# Altium PCB oled_control.PcbDoc
Units mil, origin at the board's own origin, x right, y up, seen from the top; angles counter-clockwise.
Board outline 6000 x 4000 mil, 2 copper layers (Top Layer, Bottom Layer); 53 components, 39 nets, 197 pads, 68 vias.
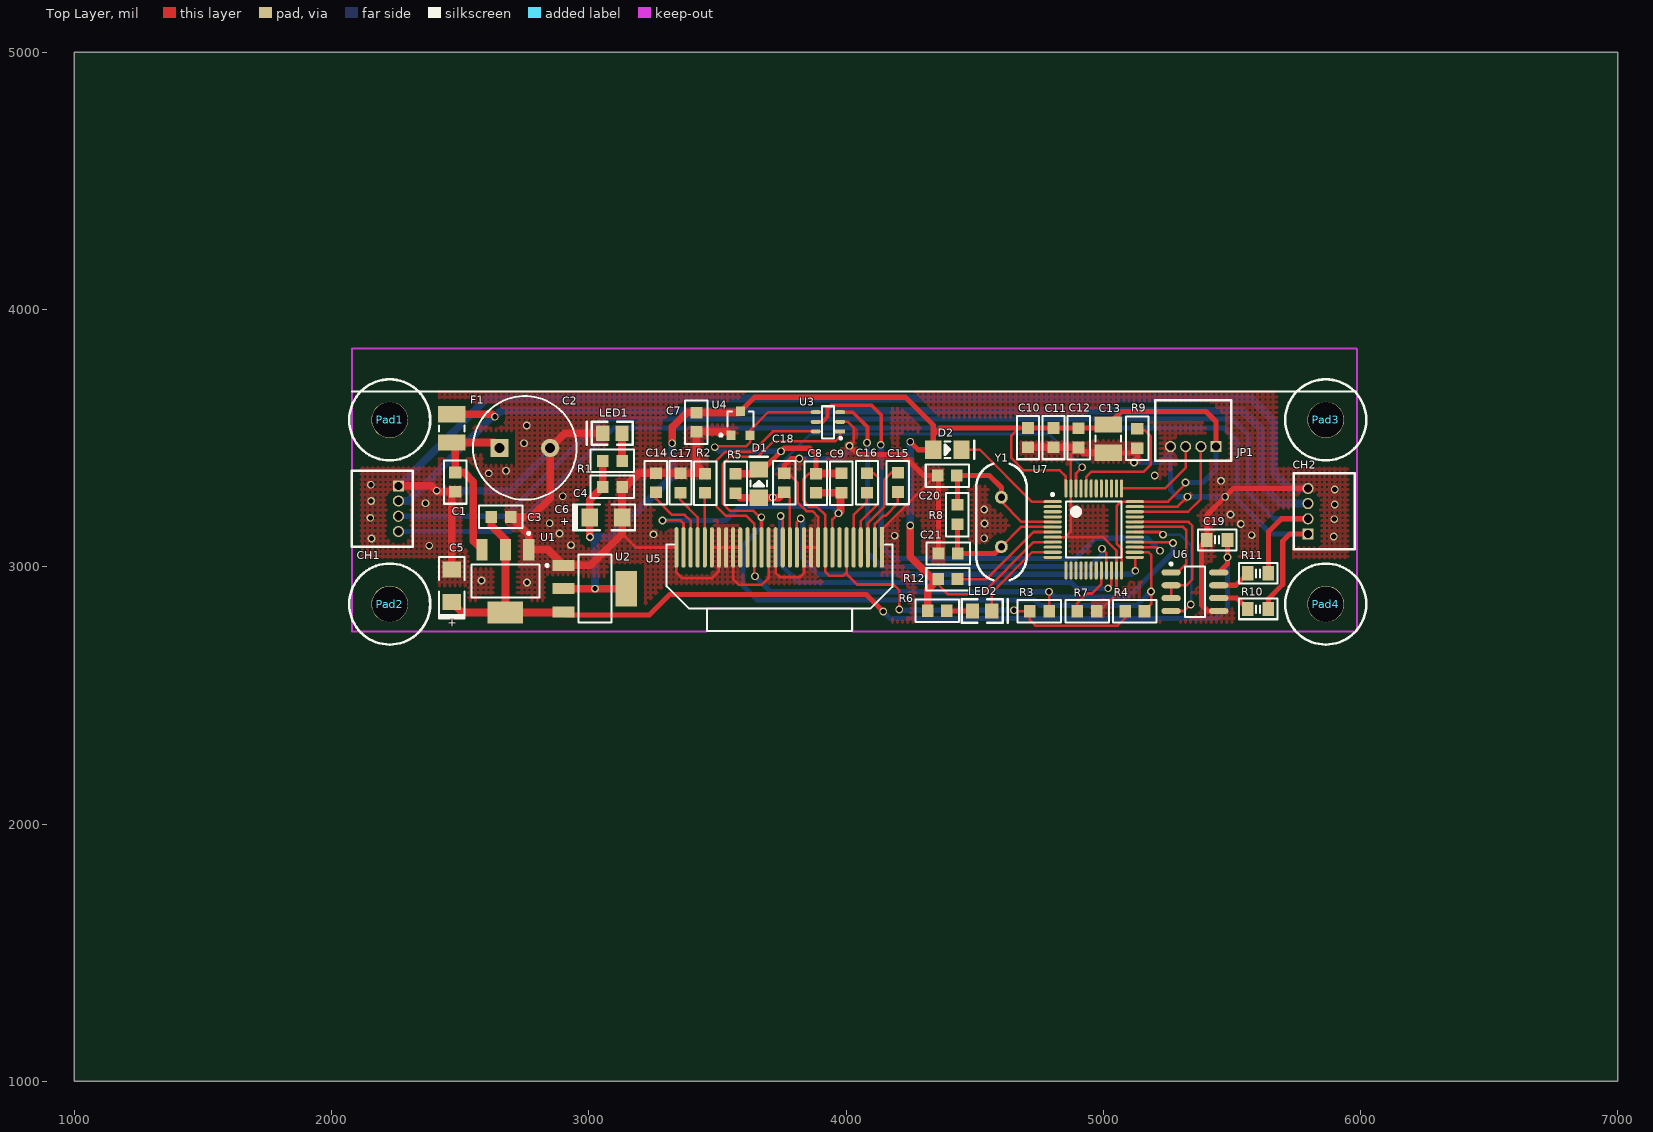
[diagram p0: Top Layer view]
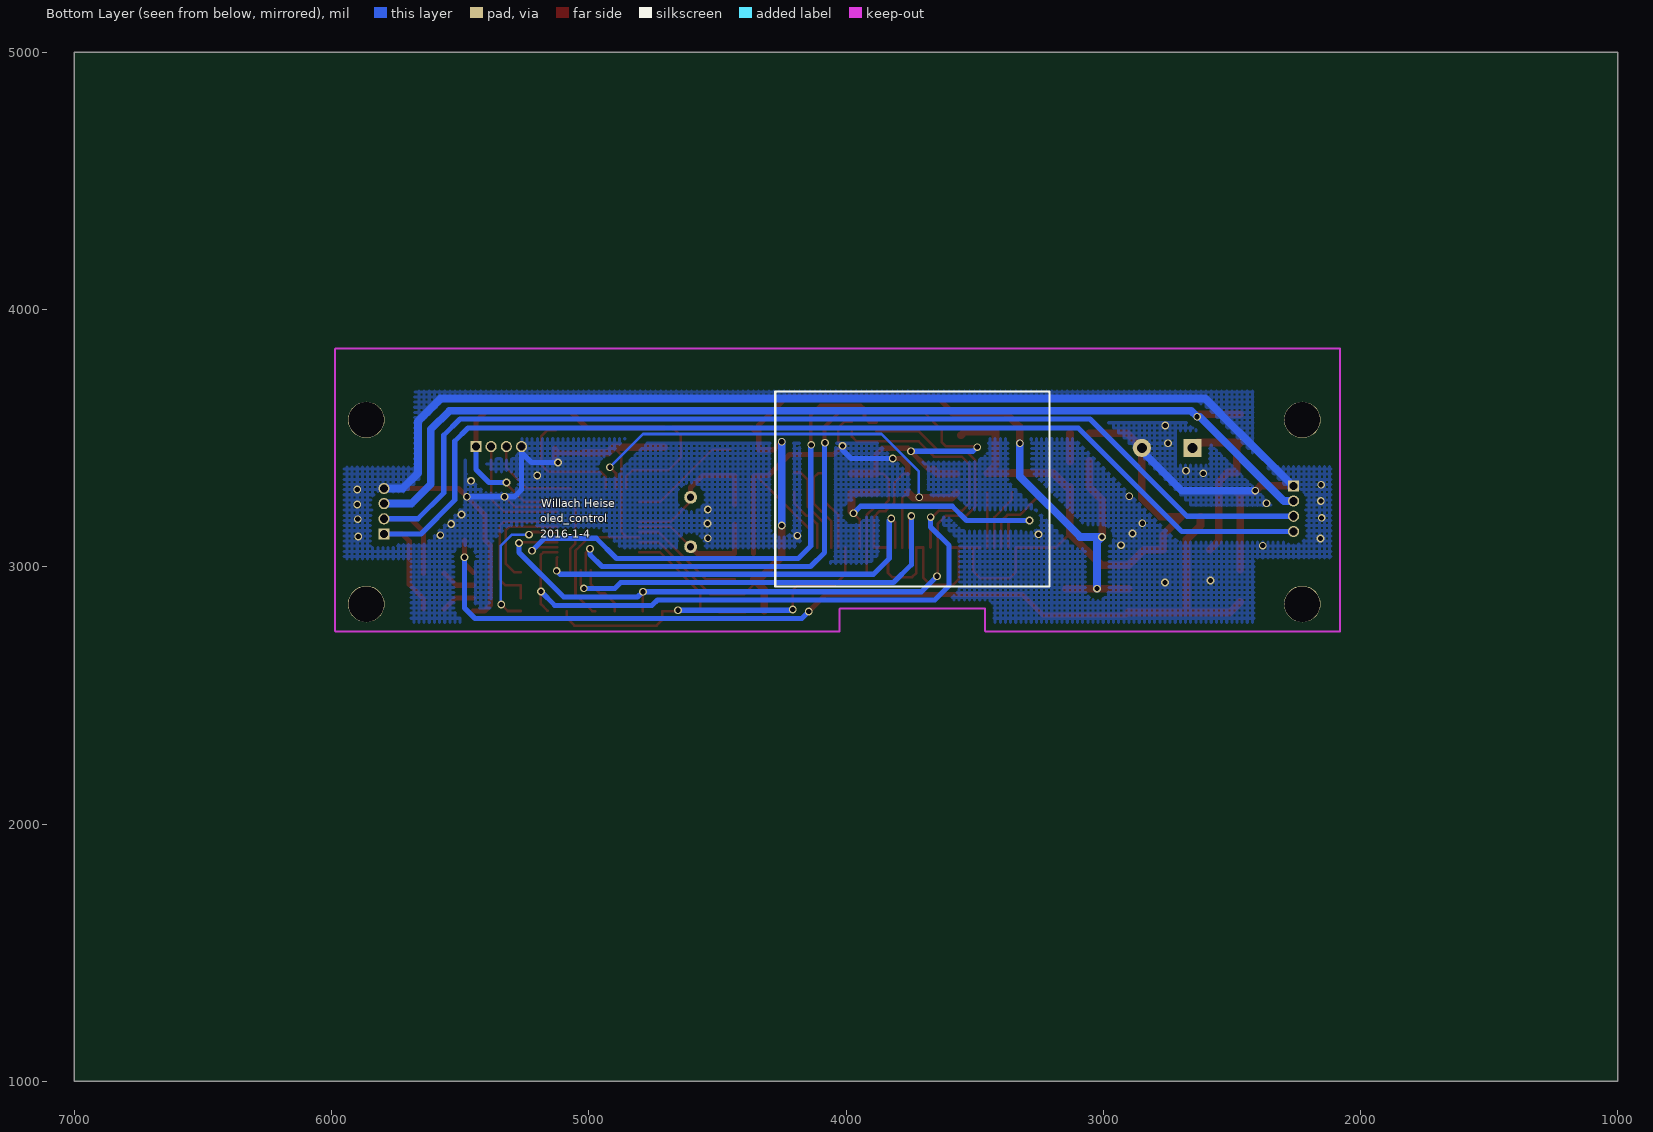
[diagram p1: Bottom Layer view, seen from below]

## Layer stack, top to bottom
Top Solder: solder mask 0.4, Solder Resist, Dk 3.5
Top Layer: signal copper 1.4
Dielectric 1: dielectric 12.6, FR-4, Dk 4.8
Bottom Layer: signal copper 1.4
Bottom Solder: solder mask 0.4, Solder Resist, Dk 3.5

## Board outline
1000,1000 7000,1000 7000,5000 1000,5000

## Design rules (kind name [scope] priority, off if disabled: settings)
Clearance Clearance_1 [InPolygon] p1: gap=25
Clearance [All] p2: gap=7
ComponentClearance [All] p1: gap=0 collisioncheckmode=3 verticalgap=0 showdistances=FALSE
PolygonConnect [All] p1: connectstyle=Direct reliefconductorwidth=10 reliefentries=4 polygonreliefangle="90 Angle" airgapwidth=10
RoutingVias [All] p1: holewidth=28 width=50 viastyle="Through Hole" minholewidth=28 minwidth=50 maxholewidth=28 maxwidth=50
SolderMaskExpansion [All] p1: expansion=4
Width [All] p1: maxlimit=100 minlimit=10 preferedwidth=100
28 further rules are at their usual default settings.

## Components (designator, comment, footprint, x,y, rotation, side; value= is the part's Value field where it differs from the comment)
C1 "Cap" 0805 2481,3329 r90 top
C2 "C_2200uF" C5*10 2653,3462 r0 top
C3 "Cap" 0805 2659,3194 r180 top
C4 "Cap" 0805 3092,3310 r180 top
C5 "Cap Pol3" "CAP A-3216" 2467,2926 r90 top
C6 "Cap Pol3" "CAP A-3216" 3067,3192 r0 top
C7 "Cap" 0805 3419,3562 r270 top
C8 "Cap" 0805 3883,3325 r270 top
C9 "Cap" 0805 3982,3326 r270 top
C10 "Cap" 0805 4707,3502 r90 top
C11 "Cap" 0805 4806,3502 r90 top
C12 "Cap" 0805 4904,3501 r90 top
C13 "Cap Pol1" 3225[1210]#1 5020,3498 r270 top
C14 "Cap" 0805 3261,3327 r270 top
C15 "Cap" 0805 4202,3328 r270 top
C16 "Cap" 0805 4081,3326 r90 top
C17 "Cap" 0805 3356,3326 r90 top
C18 "Cap" 0805 3760,3327 r270 top
C19 "Cap" C0805tan 5443,3104 r180 top
C20 "Cap" 0805 4394,3355 r0 top
C21 "Cap" 0805 4397,3052 r0 top
CH1 "HEADER1X4" CON4_1.5 2260,3226 r270 top
CH2 "HEADER1X4" CON4_1.5 5796,3216 r90 top
D1 "Diode 1N4148" LL34 3661,3268 r90 top
D2 "Diode 1N4148" LL34 4339,3455 r0 top
F1 "FUSE" 3225[1210]#2 2467,3593 r270 top
JP1 "4 HEADER" CON4_1.5 5350,3467 r180 top
LED1 "" LED-0805 3129,3519 r180 top
LED2 "" LED-0805 4492,2828 r0 top
Pad1 "Pad" pad35 2225,3571 r0 top
Pad2 "Pad" pad35 2225,2855 r0 top
Pad3 "Pad" pad35 5864,3571 r0 top
Pad4 "Pad" pad35 5864,2855 r0 top
R1 "Res2" 0805 3092,3411 r180 top
R2 "Res2" 0805 3452,3325 r90 top
R3 "Res2" 0805 4752,2827 r180 top
R4 "Res2" 0805 5123,2827 r180 top
R5 "Res2" 0805 3571,3324 r90 top
R6 "Res2" 0805 4355,2829 r180 top
R7 "Res2" 0805 4937,2827 r0 top
R8 "Res2" 0805 4433,3203 r270 top
R9 "Res2" 0805 5132,3499 r90 top
R10 "Res2" C0805tan 5602,2836 r0 top
R11 "Res2" C0805tan 5602,2975 r0 top
R12 "Res2" 0805 4396,2952 r0 top
U1 "AMS1117-5.0" SOT223 2676,2944 r180 top
U2 "AMS1117-3.3" SOT223 3024,2915 r270 top
U3 "GT20L16S1Y" SOT23-6 3977,3526 r180 top
U4 "662K" SOT-23 3590,3558 r0 top
U5 "OLED_0.96_12864" OLED_0.96_12864 4140,3075 r180 top
U6 "MAX485CSA" NS08-L 5264,2978 r0 top
U7 "STM32F103C8T6" LQFP48 4963,3145 r0 top
Y1 "8MHz" XTAL_US 4604,3270 r270 top

## Footprints (in the part's own frame and the unit in brackets; to place one, negate y for a bottom-side part, rotate by r counter-clockwise, add the part's x,y. Pads: shape width x height; smd on the part's side, far side on the other; paste and mask are expansions set on the pad)
0805 [mm] "1.14mm,1.2mm,3.05mm"
  rect 1.14x1.2 smd: 1(-0.95,0) 2(0.95,0)
  silkscreen extent -2.13,-1.12 2.16,1.09
3225[1210]#1 [mm] "Chip Resistor; Body 3.2 x 2.5 mm (LxW typ)"
  rect 1.6x2.7 smd: 1(-1.4,0) 2(1.4,0)
  silkscreen extent -0.3,-1.25 0.3,1.25
3225[1210]#2 [mm] "Chip Resistor; Body 3.2 x 2.5 mm (LxW typ)"
  rect 1.6x2.7 smd: 1(0,0) 2(2.8,0)
  silkscreen extent 1.1,-1.25 1.7,1.25
C5*10 [mm]
  rect 1.8x1.8 hole 1: 1(0,0)
  round 1.8 hole 1: 2(5,0)
  silkscreen extent -2.62,-5.11 7.62,5.11
C0805tan [mil]
  rect 45x55 smd: 1(-40,0) 2(40,0)
  silkscreen extent -75,-40 75,40
"CAP A-3216" [mm]
  rect 1.6x1.8 smd: 1(-1.6,0) 2(1.6,0)
  silkscreen extent -3.25,-1.27 2.85,1.27
CON4_1.5 [mm]
  rect 1.1x1.1 hole 0.8: 1(-2.25,0)
  round 1.1 hole 0.8: 2(-0.75,0) 3(0.75,0) 4(2.25,0)
  silkscreen extent -3.75,-4.6 3.75,1.4
LED-0805 [mm]
  rect 1.3x1.5 smd: 1(0,0) 2(1.9,0)
  silkscreen extent -1.08,-1.14 3.49,1.14
LL34 [mm]
  rect 1.6x1.8 smd: 1(0,0) 2(2.8,0)
  silkscreen extent 1.1,-0.89 4.07,0.89
LQFP48 [mm]
  oval 1.8x0.3 smd: 1(-4.05,2.75) 2(-4.05,2.25) 3(-4.05,1.75) 4(-4.05,1.25) 5(-4.05,0.75) 6(-4.05,0.25) 7(-4.05,-0.25) 8(-4.05,-0.75) 9(-4.05,-1.25) 10(-4.05,-1.75) 11(-4.05,-2.25) 12(-4.05,-2.75) 25(4.05,-2.75) 26(4.05,-2.25) 27(4.05,-1.75) 28(4.05,-1.25) 29(4.05,-0.75) 30(4.05,-0.25) 31(4.05,0.25) 32(4.05,0.75) 33(4.05,1.25) 34(4.05,1.75) 35(4.05,2.25) 36(4.05,2.75)
  oval 0.3x1.8 smd: 13(-2.75,-4.05) 14(-2.25,-4.05) 15(-1.75,-4.05) 16(-1.25,-4.05) 17(-0.75,-4.05) 18(-0.25,-4.05) 19(0.25,-4.05) 20(0.75,-4.05) 21(1.25,-4.05) 22(1.75,-4.05) 23(2.25,-4.05) 24(2.75,-4.05) 37(2.75,4.05) 38(2.25,4.05) 39(1.75,4.05) 40(1.25,4.05) 41(0.75,4.05) 42(0.25,4.05) 43(-0.25,4.05) 44(-0.75,4.05) 45(-1.25,4.05) 46(-1.75,4.05) 47(-2.25,4.05) 48(-2.75,4.05)
  silkscreen extent -4.17,-2.75 2.75,3.57, body extent -3.5,-3.5 3.5,3.5, height 1.6
NS08-L [mm] "SOIC, 8-Leads, Body 4.9x3.9mm, Pitch 1.27mm, IPC High Density"
  oval 1.9x0.6 smd: 1(0,0) 2(0,-1.27) 3(0,-2.54) 4(0,-3.81) 5(4.7,-3.81) 6(4.7,-2.54) 7(4.7,-1.27) 8(4.7,0)
  silkscreen extent -0.12,-4.41 3.35,0.97, body extent 0.4,-4.36 4.3,0.55, height 1.75
OLED_0.96_12864 [mm]
  rect 0.4x4 smd: 1(0,0)
  oval 0.4x4 smd: 2(0.7,0) 3(1.4,0) 4(2.1,0) 5(2.8,0) 6(3.5,0) 7(4.2,0) 8(4.9,0) 9(5.6,0) 10(6.3,0) 11(7,0) 12(7.7,0) 13(8.4,0) 14(9.1,0) 15(9.8,0) 16(10.5,0) 17(11.2,0) 18(11.9,0) 19(12.6,0) 20(13.3,0) 21(14,0) 22(14.7,0) 23(15.4,0) 24(16.1,0) 25(16.8,0) 26(17.5,0) 27(18.2,0) 28(18.9,0) 29(19.6,0) 30(20.3,0)
  silkscreen extent -1.02,-0.3 21.26,8.26
pad35 [mm]
  round 3.6 hole 3.5: 1(0.025,0)
  silkscreen extent -3.97,-4 4.03,4
SOT23-6 [mm]
  rect 1x0.4 smd: 1(0,0)
  oval 1x0.4 smd: 2(0,-0.95) 3(0,-1.9) 4(2.4,-1.9) 5(2.4,-0.95) 6(2.4,0)
  silkscreen extent -0.15,-2.49 1.8,0.76
SOT223 [mm] "SOT-223/SC-73; 4 Leads; Body 6.7 x 7.3 mm, inc. leads (LxW max)"
  rect 1.1x2.15 smd: 1(-2.3,-3.1) 2(0,-3.1) 3(2.3,-3.1)
  rect 3.5x2.15 smd: 4(0,3.1)
  silkscreen extent -3.35,-4.85 3.35,1.63
SOT-23 [mm]
  rect 0.9x0.95 smd: 1(-0.95,-1.175) 2(0.95,-1.175) 3(0,1.175)
  silkscreen extent -2.07,-1.3 1.3,1.18
XTAL_US [mil]
  round 50 hole 28: 1(0,0) 2(192.13,0)
  silkscreen extent -131,-98 323,98

## Part data
C1 C3 C4 C7 C8 C9 C10 C11 C12 C14 C15 C16 C17 C18 C19 C20 C21: "Capacitor"
C5 C6: "Polarized Capacitor (Surface Mount)"
C13: "Polarized Capacitor (Radial)"
D1 D2: "High Conductance Fast Diode"
JP1: "4 Pin Header"
LED1 LED2: library part LED2, "Typical RED, GREEN, YELLOW, AMBER GaAs LED"
R1 R2 R3 R4 R5 R6 R7 R8 R9 R10 R11 R12: "Resistor"
U1 U2: library part AMS1117-5
Y1: library part XTAL, "Crystal Oscillator"

## Via types
v1: diameter 30, hole 20, Top Layer to Bottom Layer, 68 vias

## Nets (pads, with @x,y where several pads share a name; then routed paths per layer and width w, separated by ;. In a path a pad name is that pad's centre, name@x,y a point inside that pad or via, vN(x,y) a via of type N, cw(c..) or ccw(c..) an arc to the next point about the centre after c; other vN are vias at no path point)
485_A: CH1.4 CH2.1 R10.2 | length 4404.4
  Top Layer w20: R10.2 5642,2876 5698,2932 5698,3100 5725.42,3127.42 CH2.1
  Bottom Layer w20: CH1.4 2694.42,3137.42 3097,3540 5469,3540 5521,3488 5521,3259 5652.58,3127.42 CH2.1
485_B: CH1.3 CH2.2 R11.2 | length 4320
  Top Layer w20: R11.2 5642,3136 5692.47,3186.47 CH2.2
  Bottom Layer w20: CH1.3 2674.47,3196.47 3052,3574 5501,3574 5564,3511 5564,3287 5664.53,3186.47 CH2.2
+3.3V: C4.2 C6.1 C7.1 C10.2 C11.2 C12.2 C13.1 D2.1 JP1.1 R1.2 R6.2 R12.1 U2.2 U2.4 U4.3 U7.9 U7.24 U7.36 U7.48 | length 6448.5
  Top Layer w10: R12.1 4358.6,2930.4 4396,2893 4526,2893 4728.79,3095.79 U7.9 ; C10.2 4673.4,3539.4 4642,3508 4642,3424 4691,3375 4831,3375 4854.73,3351.27 U7.48 ; U7.24 5071.27,3070.73 5052,3090 5052,3237 5068.27,3253.27 U7.36 5252.27,3253.27 5320,3321 v1(5320,3328)
  Top Layer w20: U4.3 3644.74,3659 4231,3659 4339,3551 4339,3512 ; v1(4250,3486) 4281,3455 D2.1 4339,3512 ; 4673.4,3539.4 4366.4,3539.4 4339,3512 ; C10.2 C11.2 5006.28,3539.4 C13.1 5070.88,3604 5399,3604 5438.58,3564.42 JP1.1
  Top Layer w30: U2.2 v1(3024,2915) U2.4 ; v1(3005,3116) 3004.01,3116.99 C6.1 3004.01,3259.41 C4.2 R1.2 ; v1(3324,3480) 3325,3481 3325,3543 3381.4,3599.4 C7.1 3585.14,3599.4 U4.3 ; v1(4250,3160) 4250,3039 4337,2952 R12.1 4317.6,2911 R6.2
  Bottom Layer w20: v1(5320,3328) 5388,3328 5438.58,3378.58 JP1.1
  Bottom Layer w30: v1(3024,2915) 3024,3097 v1(3005,3116) 3090,3116 3325,3351 3325,3479 v1(3324,3480) ; v1(4250,3160) v1(4250,3486)
+5V: C3.2 C5.1 C19.1 U1.2 U1.4 U2.3 U6.8 | length 3860.9
  Top Layer w20: U2.3@2899.46,2821.95 2909.41,2812 3235,2812 3315,2892 4079,2892 v1(4145,2826) ; U6.8 5483,3011.96 v1(5483,3037) C19.1
  Top Layer w30: C5.1 2508.06,2821.95 U1.4 ; C3.2 2621.6,3160.4 2676,3106 U1.2 U1.4 ; U2.3 2899.46,2821.95 U1.4
  Bottom Layer w20: v1(4145,2826) 4172,2799 5442,2799 5483,2840 v1(5483,3037)
+12V_IN: CH1.2 CH2.3 F1.1 | length 4128.2
  Top Layer w30: F1.1 2625,3593 v1(2635,3583)
  Bottom Layer w30: CH1.2 2297.53,3255.53 2625,3583 v1(2635,3583) 2659,3607 5541,3607 5614,3534 5614,3321 5689.47,3245.53 CH2.3
CLK: R4.1 U3.1 U5.18 U7.26 | length 3194.9
  Top Layer w10: v1@3667,3189 3638,3218 3548,3218 3521,3245 3521,3399 3550,3428 3658,3428 3718,3488 3959,3488 3977,3506 U3.1 ; v1(3671,3193) 3671.5,3192.5 U5.18 ; U7.26 5176.58,3056.42 5186,3047 v1(5186,2904) 5186,2854.6 R4.1@5160.4,2829
  Bottom Layer w20: v1(3671,3193) 3671,3155 3599,3083 3599,2927 3655,2871 4733,2871 4754,2850 5132,2850 v1(5186,2904)
CS1: U5.13 U7.25 | length 1655.8
  Top Layer w10: U5.13 3809.29,3173.29 v1(3824,3188) ; U7.25 5125,3034.18 v1(5125,2984)
  Bottom Layer w20: v1(3824,3188) 3832,3180 3832,3032 3893,2971 5112,2971 v1(5125,2984)
CS2: U3.3 U7.21 | length 1686.8
  Top Layer w10: v1(4995,3070) 5012.21,3052.79 U7.21
  Top Layer w15: U3.3 4026.2,3600.8 4083,3544 4083,3483 v1(4082,3482)
  Bottom Layer w20: v1(4082,3482) 4083,3481 4083,3056 4138,3001 4949,3001 4995,3047 v1(4995,3070)
D/C: U5.15 U7.22 | length 1703.3
  Top Layer w10: v1(3746,3197) 3751,3197 3754.17,3193.83 U5.15 ; v1(5019,2916) 5031.9,2928.9 U7.22
  Bottom Layer w20: v1(3746,3197) 3746,3008 3815,2939 4876,2939 4899,2916 v1(5019,2916)
FSO: U3.5 U7.27 | length 2086.9
  Top Layer w10: U7.27 5206.9,3076.1 v1(5221,3062)
  Top Layer w15: U3.5 3908.4,3563.4 3928,3583 3928,3613 3943,3628 4099,3628 4137,3590 4137,3476 v1(4135,3474)
  Bottom Layer w20: v1(4135,3474) 4137,3472 4137,3081 4186,3032 4892,3032 4971,3111 5172,3111 v1(5221,3062)
GND: C1.1 C2.2 C3.1 C4.1 C5.2 C6.2 C7.2 C10.1 C11.1 C12.1 C13.2 C14.1 C17.2 C18.1 C19.2 C20.1 C21.1 CH1.1 CH2.4 JP1.4 LED1.2 R2.2 R7.2 R9.1 U1.1 U2.1 U3.2 U4.1 U5.1 U5.10 U5.11 U5.12 U5.16 U5.17 U5.21 U5.22 U5.23 U5.24 U5.25 U5.30 U6.5 U7.8 U7.23 U7.35 U7.47 | length 13504
  Top Layer w10: 3129.99,3128.99 3183.98,3075 U5.30 3340.79,2978.21 3364,2955 3477,2955 3506.14,2984.14 U5.24 ; U5.25 U5.24 ; U5.21 U5.22 ; C18.1@3760,3362.4 3776.6,3362.4 3812,3327 3812,3250 3846,3216 3870,3216 3891.97,3194.03 U5.10 U5.11 U5.12 3836.85,2975.85 3821,2960 3743,2960 3726.61,2976.39 U5.16 U5.17 3699.05,2957.05 3672,2930 3584,2930 3561.26,2952.74 U5.22 ; U3.2 4007.6,3563.4 4030,3541 4030,3486 v1(4014,3470) ; U5.1 4140,3145 4350,3355 C20.1 ; U7.8 4853.47,3115.47 ; C12.1@4903,3464.6 4874.42,3436.02 U7.47 4874.42,3136.42 4853.47,3115.47 ; R7.2 4986,2827 5051.58,2892.58 U7.23 5051.58,3062.38 5035,3078.96 ; 5035,3079 4998.53,3115.47 4853.47,3115.47 ; U7.35 5289.58,3233.58 v1(5328,3272) ; U5.24 U5.23 U5.22
  Top Layer w20: C18.1@3760,3362.4 C18.1 3760,3394 3787,3421 v1(3818,3421) ; v1(4014,3470) 4048,3436 4220,3436 4301,3355 C20.1@4350,3355 ; C20.1 4359.6,3352 C21.1 ; C13.2 5115.28,3442.88 R9.1@5128,3455.6 ; v1(5120,3405) 5132,3417 R9.1 ; U6.5 5405,2828 5382,2851 5382,3083 C19.2 5403,3201 v1(5474,3272) 5506.58,3304.58 CH2.4
  Top Layer w30: CH1.1 2388.42,3314.58 2411.4,3291.6 C1.1 2467,3277.6 C5.2 ; LED1.2 2906.85,3519 C2.2 2849.85,3266.85 2777,3194 C3.1 2766.55,3123.85 U1.1 2841.46,3066.05 U2.1 3006.55,3005.55 3129.99,3128.99 C6.2 3129.4,3192.59 C4.1 3141,3310 3195.4,3364.4 C14.1 3355,3364.4 C17.2 3451,3363.4 3419,3395.4 C7.2 3539.74,3524.6 U4.1 ; C10.1 C11.1 4903,3464.6 C12.1 4924.72,3442.88 C13.2
  Bottom Layer w20: v1(3818,3421) 3981,3421 4014,3454 v1(4014,3470) ; v1(5120,3405) 5222.42,3405 5261.42,3444 ; JP1.4 5261.42,3444 ; v1(5474,3272) v1(5328,3272) 5289,3272 5261.42,3299.58 5261.42,3444
  Bottom Layer w30: CH1.1 2263.58,3314.58 2474,3525 2475,3525 2604,3654 5576,3654 5664,3566 5664,3364 5723.42,3304.58 CH2.4 ; v1(2409,3296) 2695,3296 2849.85,3450.85 C2.2
  other v1: 2760,2939 2583,2947 2380,3082 2931,3084 2155,3110 4537,3111 5896,3118 4189,3121 5577,3123 3252,3126 2886,3129 5535,3166 4538,3168 2848,3169 5898,3185 2151,3190 5495,3203 4537,3223 5900,3242 2365,3247 2154,3256 2899,3274 5900,3300 2153,3319 5458,3334 5200,3355 2611,3363 2678,3373 2748,3480 2759,3549
LED1: LED2.2 U7.11 | length 373.4
  Top Layer w10: LED2.2 4566.8,2899.8 4723.42,3056.42 U7.11
MOSI: R3.1 U3.6 U5.19 U7.28 | length 2983.2
  Top Layer w10: v1(3646,2963) 3643.94,2965.06 U5.19 3643.94,3166.06 3611,3199 3532,3199 3497,3234 3497,3414 3530,3447 3637,3447 3716,3526 U3.6 ; R3.1 v1(4789.4,2902.6) ; U7.28 5267.21,3095.79 v1(5271,3092)
  Bottom Layer w20: v1(3646,2963) 3706.4,2902.6 v1(4789.4,2902.6) 4810,2882 5097,2882 5271,3056 v1(5271,3092)
NetC1_2: C1.2 C2.1 F1.2 U1.3 | length 680.6
  Top Layer w30: U1.3 2551,3100.5 2551,3331 2515.6,3366.4 C1.2 2481,3468.76 F1.2 2632.24,3482.76 C2.1
NetC8_2: C8.2 C9.2 U5.8 U5.29 | length 1221.9
  Top Layer w10: v1(3287,3180) 3357,3180 3368.35,3168.65 U5.29 ; U5.8 3947.09,3184.09 v1(3971,3208)
  Top Layer w30: C8.2@3880,3288.6 C8.2@3883,3288.6 ; C8.2 3978,3287.6 3979,3286.6 3979,3216 v1(3971,3208)
  Bottom Layer w20: v1(3287,3180) 3532,3180 3587,3235 3944,3235 v1(3971,3208)
NetC14_2: C14.2 U5.28 | length 299.2
  Top Layer w10: C14.2 3261,3265 3324,3202 3373,3202 3395.9,3179.1 U5.28
NetC15_1: C15.1 U5.3 | length 355
  Top Layer w10: U5.3 4084.88,3169.88 4149,3234 4149,3338.4 4177,3366.4 4201,3366.4 C15.1
NetC15_2: C15.2 U5.2 | length 259
  Top Layer w10: U5.2 4112.44,3166.44 4144,3198 4153,3198 4202,3247 C15.2 C15.2@4202,3291.6
NetC16_1: C16.1 U5.5 | length 236.8
  Top Layer w10: U5.5 4029.76,3200.76 4081,3252 C16.1 C16.1@4081,3290.6
NetC16_2: C16.2 U5.4 | length 352.5
  Top Layer w10: U5.4 4057.32,3177.32 4126,3246 4126,3346 4108.6,3363.4 4083,3363.4 C16.2@4081,3365.4
NetC17_1: C17.1 U5.27 | length 241.5
  Top Layer w10: C17.1 3356,3260 3423.46,3192.54 U5.27
NetC20_2: C20.2 R8.1 U7.5 Y1.1 | length 594.4
  Top Layer w10: Y1.1 4604,3253 4682.47,3174.53 U7.5
  Top Layer w20: R8.1 4433,3353.4 C20.2 4557,3355 4604,3308 Y1.1
NetC21_2: C21.2 R8.2 U7.6 Y1.2 | length 525.9
  Top Layer w10: Y1.2 4680.97,3154.84 U7.6
  Top Layer w20: R8.2 4433,3053.4 C21.2 4578.13,3052 Y1.2
NetD2_2: D2.2 U7.1 | length 437.9
  Top Layer w10: D2.2 4520,3455 4721.73,3253.27 U7.1
NetLED1_1: LED1.1 R1.1 | length 110.2
  Top Layer w30: LED1.1 3129,3411.4 R1.1 R1.1@3129.4,3409
NetLED2_1: LED2.1 R6.1 | length 100
  Top Layer w20: R6.1 4393.4,2828 LED2.1
NetR2_1: R2.1 U5.26 | length 213
  Top Layer w10: U5.26 3451.02,3286.62 R2.1
NetR7_1: R7.1 U7.20 | length 208.2
  Top Layer w10: R7.1 4899.6,2858.6 4937,2896 4956,2896 4992.53,2932.53 U7.20
NetR9_2: R9.2 U7.44 | length 492.3
  Top Layer w10: U7.44 4933.47,3349.47 4953,3369 5156,3369 5185,3398 5185,3507 5161.6,3530.4 R9.2@5128,3530.4
NetR10_1: R10.1 U6.6 | length 130.4
  Top Layer w20: U6.6 5520,2878 R10.1
NetR11_1: R11.1 U6.7 | length 132.4
  Top Layer w20: U6.7 5515,2928 R11.1
NetR12_2: R12.2 U7.7 | length 446
  Top Layer w10: R12.2 4546,2952 4729.16,3135.16 U7.7
PA9_USART1_TX: U6.4 U7.30 | length 557.8
  Top Layer w10: U7.30 5221.84,3135.16 v1(5232,3125) ; U6.4 5315,2828 v1(5340,2853)
  Bottom Layer w10: v1(5232,3125) 5299,3125 5342,3082 5342,2855 v1(5340,2853)
PA10_USART1_RX: U6.1 U7.31 | length 408.1
  Top Layer w10: U7.31 5310.16,3154.84 5322,3143 5322,3011 5289,2978 U6.1
PA11_RE485: U6.2 U6.3 U7.32 | length 580.1
  Top Layer w10: U7.32 5331.47,3174.53 5346,3160 5346,2951 5323,2928 U6.2 U6.3
RES: C18.2 D1.1 R5.1 U5.14 U7.46 | length 1938
  Top Layer w10: C18.2 3781.73,3267.87 U5.14 ; U7.46 4894.1,3363.1 v1(4918,3387)
  Top Layer w30: R5.1 3589.6,3268 D1.1 3738.4,3268 C18.2
  Bottom Layer w10: v1(3715,3270) 3718,3273 3718,3372 3862,3516 4789,3516 v1(4918,3387)
TCK/SWCLK: JP1.3 U7.37 | length 364.9
  Top Layer w10: U7.37 5240.45,3304.45 5320.47,3384.47 JP1.3
TMS/SWDIO: JP1.2 U7.34 | length 481.1
  Top Layer w10: U7.34 5329.9,3213.9 5379.53,3263.53 JP1.2
VCC_OLED: C8.1 C9.1 D1.2 R3.2 R4.2 R5.2 U3.4 U4.2 U5.6 U5.9 | length 3210.4
  Top Layer w10: v1(3490,3465) 3493,3468 3612,3468 3627.4,3483.4 U4.2 3627.4,3530.4 3697.8,3600.8 U3.4 ; C8.1 3856.4,3362.4 3833,3339 3833,3259 3859,3233 3887,3233 3919.53,3200.47 U5.9 3919.53,2980.47 3935,2965 3989,2965 4002.2,2978.2 ; U5.6 4002.2,2978.2 ; v1(4207,2834) 4207,2909 4185,2931 4043,2931 4002.2,2971.8 4002.2,2978.2 ; v1(4653,2831) 4657,2827 R3.2 4714.6,2792.4 4736,2771 5056,2771 5085.6,2800.6 R4.2
  Top Layer w20: D1.2 3677.24,3378.24 3760,3461 3859,3461 3883,3437 C8.1
  Top Layer w30: R5.2 3644.17,3361.4 D1.2 ; C8.1 C9.1@3978,3362.4
  Bottom Layer w20: v1(3490,3465) 3506,3449 v1(3747,3449) ; v1(4207,2834) 4210,2831 v1(4653,2831)
pads on no net: Pad1.1 Pad2.1 Pad3.1 Pad4.1 U5.7 U5.20 U7.2 U7.3 U7.4 U7.10 U7.12 U7.13 U7.14 U7.15 U7.16 U7.17 U7.18 U7.19 U7.29 U7.33 U7.38 U7.39 U7.40 U7.41 U7.42 U7.43 U7.45

## Polygon pours and split planes (outlines as drawn)
GND on Top Layer "Top Layer-No Net" (hatched 90Degree grid 20 track 12, remove dead copper, pour order 2): 2416,3684 2418,3682 3011,3682 5662,3682 5671,3673 5675,3669 5675,3383 5985,3383 5988,3380 5986,3378 5986,3051 5986,3044 5983,3041 5976,3034 5713,3034 5685,3034 5683,3032 5684,3031 5684,2921 5684,2752 5685,2751 5682,2748 4026,2748 4026,2835 4025,2836 4024,2837 3459,2837 3459,2750 3457,2748 2416,2748 2416,3041 2412,3037 2084,3037 2084,3386 2314,3386 2414,3386 2418,3390 2418,3679
GND on Bottom Layer "Top Layer-No Net" (hatched 90Degree grid 20 track 12, remove dead copper, pour order 4): 2108,3390 2410,3390 2418,3398 2418,3683 5672,3683 5679,3676 5678,3675 5678,3392 5678,3388 5682,3384 5685,3387 5978,3387 5978,3036 5975,3033 5972,3030 5736,3030 5697,3030 5695,3028 5690,3023 5690,2917 5690,2752 5691,2751 5688,2748 4026,2748 4026,2835 4025,2836 4024,2837 3459,2837 3459,2750 3458,2749 2415,2749 2415,3030 2413,3032 2411,3034 2086,3034 2086,3387 2084,3389 2124,3389

## Keep-outs
Keep-Out Layer:
  lines w7.87: 2080,3846 2080,2748 3453,2748 3457,2748 3459,2750 ; 2080,3848 3020,3848 5985,3848 ; 3459,2761 3459,2750 ; 5986,3847 5986,2750 ; 3459,2750 3459,2837 4024,2837 4025,2836 4025,2749 4026,2748 5984,2748 ; 5984,2748 5986,2750 ; 5984,2748 5986,2750

## Silkscreen, mask and mechanical layers (free items; w line width, h text height)
Top Overlay:
  lines w7.87: 2080,3682 4282,3682 ; 4265,3682 5983,3682
Bottom Overlay:
  text "Willach Heise" at 5185,3231 h31.5
  text "oled_control" at 5188,3173 h31.5
  text "2016-1-4" at 5188,3113 h31.5

## Text inside footprints (layer, text, board x,y; h text height)
C5: Top Overlay "+" at 2482,2762 h31.5 r90
C6: Top Overlay "+" at 2889.01,3162 h31.5